# EAGLE board CPC_RAM512K_SN74_v2.10 (EAGLE 6.4)
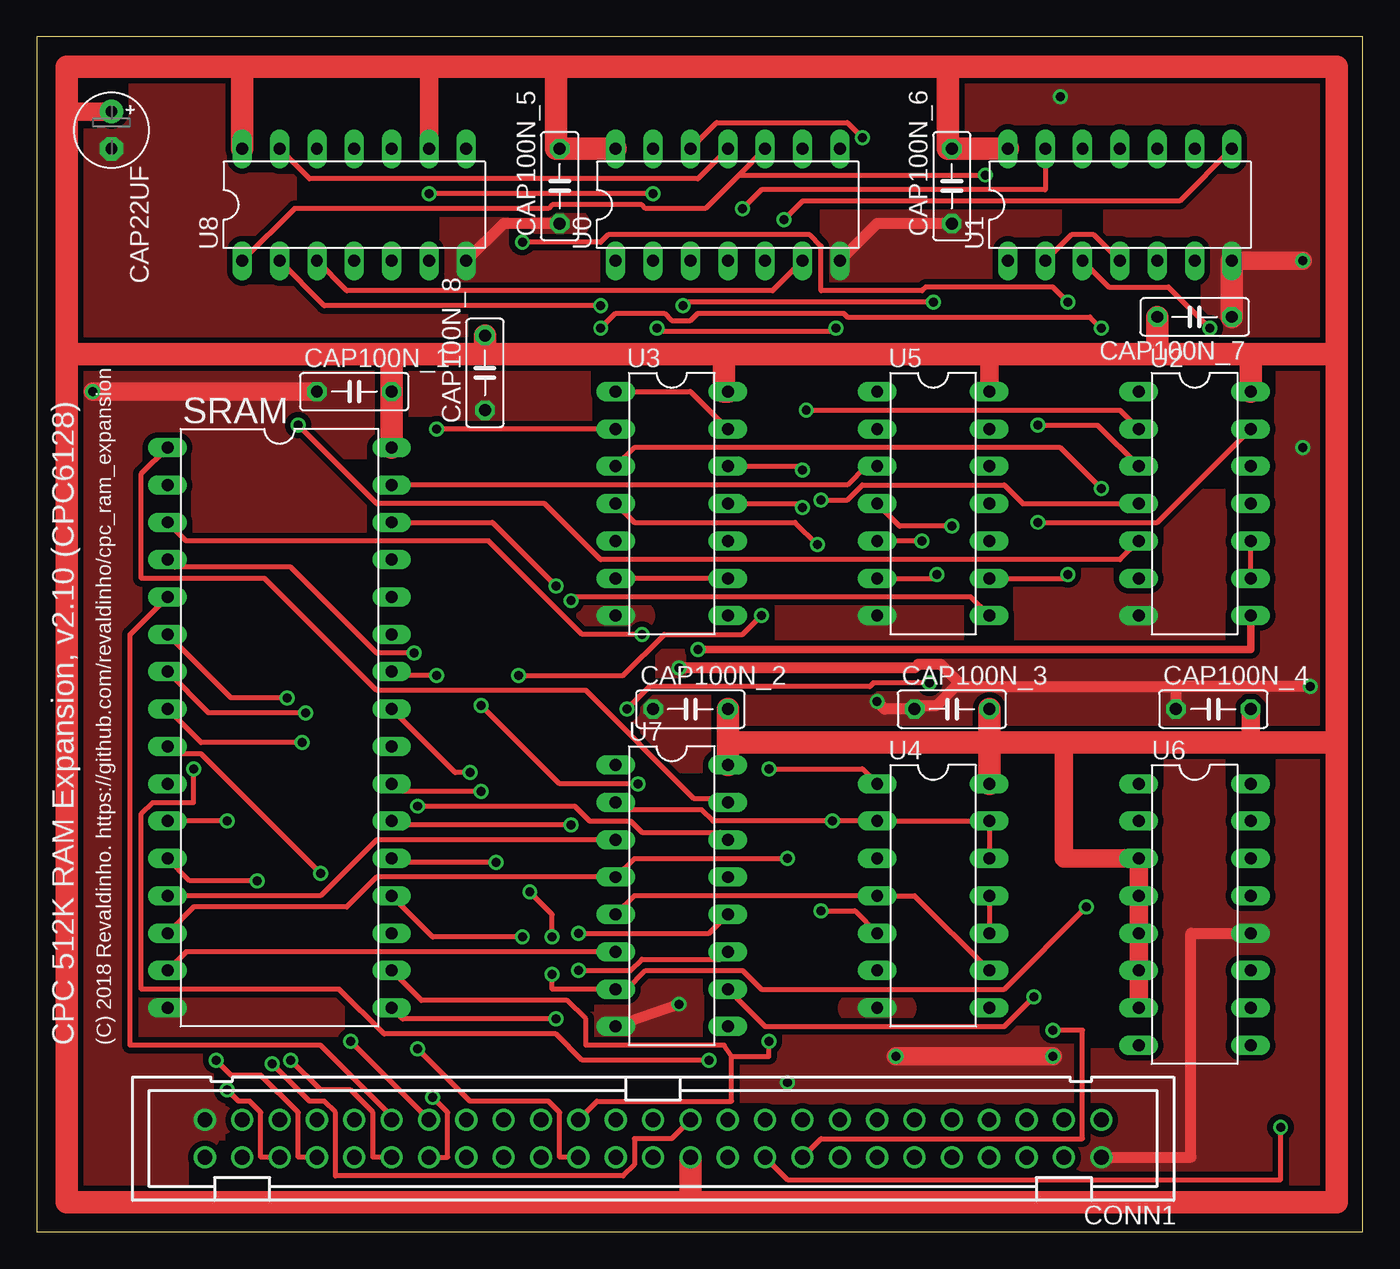
[diagram p0: board, top side]
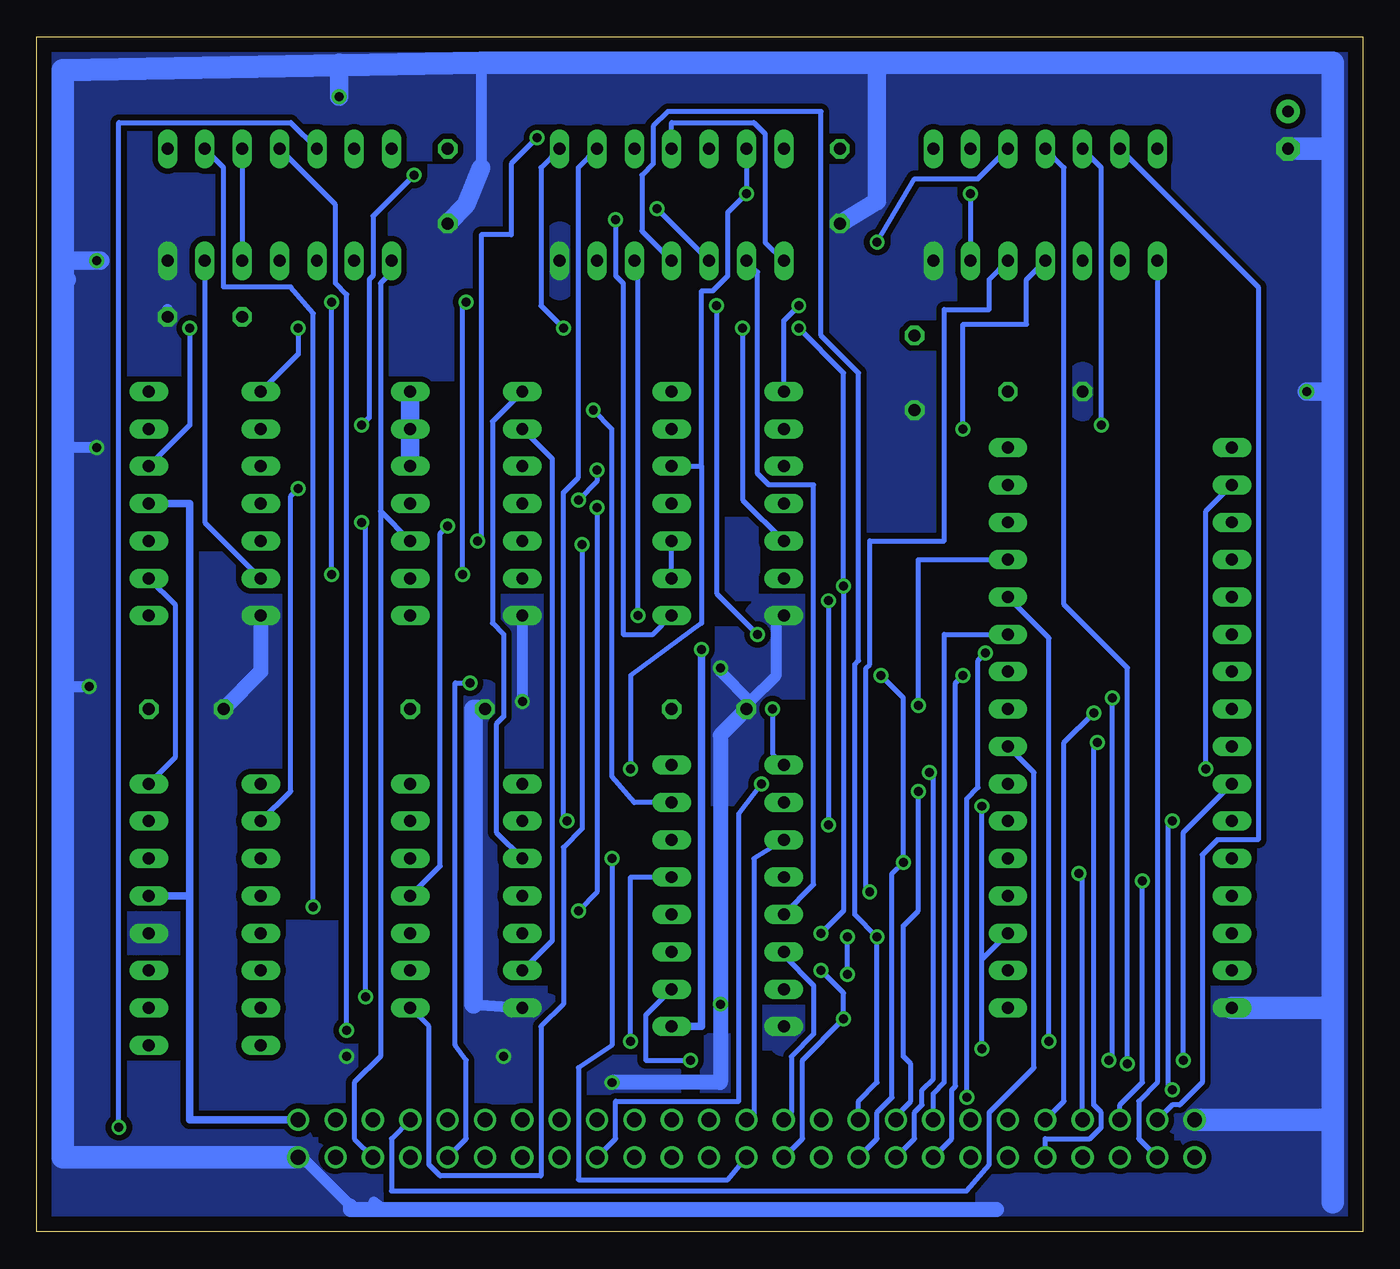
[diagram p1: board, bottom side, seen from below]

Size 90.17 x 81.28 mm. Coordinates in mm from the lower left corner, seen from the top.
Outline: 0,0 90.17,0 90.17,81.28 0,81.28 0,0
Copper layers (1*16): Top 0.035mm / dielectric 1.5mm / Bottom 0.035mm
Design rules "default": minimum track width 10mil, minimum drill 24mil, track to track 8mil, track to pad 8mil, pad to pad 8mil, via to via 8mil, smd to smd 8mil, copper to edge 40mil, drill to drill 8mil, minimum pad ring 10mil, minimum via ring 8mil, stop-mask expansion 4mil, vias tented up to drill 0mil, thermal gap 10mil
Net classes: 0 signal: width 0.356 mm, clearance 0.254 mm; 1 supply: width 0.762 mm, clearance 0.381 mm

## Footprints (pad centres in the part's own frame; a part is rotated, then mirrored left to right if it is on the bottom)
E2,5-5 = drill 0.813 pad 1.6: + -1.27,0 | drill 0.813 pad 1.6 octagon: - 1.27,0
C050-025X075 = drill 0.813 octagon: 1 -2.54,0; 2 2.54,0
PAK100/2500-50 = drill 1 pad 1.422: 1 -30.48,-1.27; 2 -30.48,1.27; 3 -27.94,-1.27; 4 -27.94,1.27; 5 -25.4,-1.27; 6 -25.4,1.27; 7 -22.86,-1.27; 8 -22.86,1.27; 9 -20.32,-1.27; 10 -20.32,1.27; 11 -17.78,-1.27; 12 -17.78,1.27; 13 -15.24,-1.27; 14 -15.24,1.27; 15 -12.7,-1.27; 16 -12.7,1.27; 17 -10.16,-1.27; 18 -10.16,1.27; 19 -7.62,-1.27; 20 -7.62,1.27; 21 -5.08,-1.27; 22 -5.08,1.27; 23 -2.54,-1.27; 24 -2.54,1.27; 25 0,-1.27; 26 0,1.27; 27 2.54,-1.27; 28 2.54,1.27; 29 5.08,-1.27; 30 5.08,1.27; 31 7.62,-1.27; 32 7.62,1.27; 33 10.16,-1.27; 34 10.16,1.27; 35 12.7,-1.27; 36 12.7,1.27; 37 15.24,-1.27; 38 15.24,1.27; 39 17.78,-1.27; 40 17.78,1.27; 41 20.32,-1.27; 42 20.32,1.27; 43 22.86,-1.27; 44 22.86,1.27; 45 25.4,-1.27; 46 25.4,1.27; 47 27.94,-1.27; 48 27.94,1.27; 49 30.48,-1.27; 50 30.48,1.27
DIL32 = drill 0.813 long: 1 -19.05,-7.62; 2 -16.51,-7.62; 3 -13.97,-7.62; 4 -11.43,-7.62; 5 -8.89,-7.62; 6 -6.35,-7.62; 7 -3.81,-7.62; 8 -1.27,-7.62; 9 1.27,-7.62; 10 3.81,-7.62; 11 6.35,-7.62; 12 8.89,-7.62; 13 11.43,-7.62; 14 13.97,-7.62; 15 16.51,-7.62; 16 19.05,-7.62; 17 19.05,7.62; 18 16.51,7.62; 19 13.97,7.62; 20 11.43,7.62; 21 8.89,7.62; 22 6.35,7.62; 23 3.81,7.62; 24 1.27,7.62; 25 -1.27,7.62; 26 -3.81,7.62; 27 -6.35,7.62; 28 -8.89,7.62; 29 -11.43,7.62; 30 -13.97,7.62; 31 -16.51,7.62; 32 -19.05,7.62
DIL14 = drill 0.813 long: 1 -7.62,-3.81; 2 -5.08,-3.81; 3 -2.54,-3.81; 4 0,-3.81; 5 2.54,-3.81; 6 5.08,-3.81; 7 7.62,-3.81; 8 7.62,3.81; 9 5.08,3.81; 10 2.54,3.81; 11 0,3.81; 12 -2.54,3.81; 13 -5.08,3.81; 14 -7.62,3.81
DIL16 = drill 0.813 long: 1 -8.89,-3.81; 2 -6.35,-3.81; 3 -3.81,-3.81; 4 -1.27,-3.81; 5 1.27,-3.81; 6 3.81,-3.81; 7 6.35,-3.81; 8 8.89,-3.81; 9 8.89,3.81; 10 6.35,3.81; 11 3.81,3.81; 12 1.27,3.81; 13 -1.27,3.81; 14 -3.81,3.81; 15 -6.35,3.81; 16 -8.89,3.81

## Placement (x,y rotation side)
CAP22UF  [E2,5-5]  5.08,74.93 270 top
CAP100N_1  [C050-025X075]  21.59,57.15 0 top
CAP100N_2  [C050-025X075]  44.45,35.56 0 top
CAP100N_3  [C050-025X075]  62.23,35.56 0 top
CAP100N_4  [C050-025X075]  80.01,35.56 0 top
CAP100N_5  [C050-025X075]  35.56,71.12 90 top
CAP100N_6  [C050-025X075]  62.23,71.12 90 top
CAP100N_7  [C050-025X075]  78.74,62.23 180 top
CAP100N_8  [C050-025X075]  30.48,58.42 90 top
CONN1  [PAK100/2500-50]  41.91,6.35 180 top
SRAM  [DIL32]  16.51,34.29 270 top
U0  [DIL14]  46.99,69.85 0 top
U1  [DIL14]  73.66,69.85 0 top
U2  [DIL14]  78.74,49.53 270 top
U3  [DIL14]  43.18,49.53 270 top
U4  [DIL14]  60.96,22.86 270 top
U5  [DIL14]  60.96,49.53 270 top
U6  [DIL16]  78.74,21.59 270 top
U7  [DIL16]  43.18,22.86 270 top
U8  [DIL14]  21.59,69.85 0 top

## Library data of the parts
CAP22UF CAP100N_1-CAP100N_8 = resistor
CONN1 = con-3m
SRAM U0 U1-U8 = ic-package

## Nets
A0: CONN1.33 SRAM.23
A1: CONN1.34 SRAM.25
A2: CONN1.35 SRAM.27
A3: CONN1.36 SRAM.26
A4: CONN1.37 SRAM.28
A5: CONN1.38 SRAM.4
A6: CONN1.39 SRAM.5
A7: CONN1.40 SRAM.6
A8: CONN1.41 SRAM.7
A9: CONN1.42 SRAM.8
A10: CONN1.43 SRAM.9
A11: CONN1.44 SRAM.10
A12: CONN1.45 SRAM.12
A13: CONN1.46 SRAM.11
A14: CONN1.47 U0.1 U0.11 U8.13
A15: CONN1.48 U0.10 U2.3 U8.1
BUSACK_B: CONN1.13
BUSRESET_B: CONN1.11
BUSRQ_B: CONN1.14
CLK: CONN1.1 U2.11 U6.13
CLKEN_LAT_QB: U2.9 U2.10 U6.16
CURSOR: CONN1.5
D0: CONN1.25 SRAM.13 U7.3
D1: CONN1.26 SRAM.14 U7.4
D2: CONN1.27 SRAM.15 U7.6
D3: CONN1.28 SRAM.17 U7.11
D4: CONN1.29 SRAM.18 U7.13
D5: CONN1.30 SRAM.19 U7.14
D6: CONN1.31 SRAM.20 U0.4
D7: CONN1.32 SRAM.21 U0.5
EXP_B: CONN1.3
HALT_B: CONN1.17
INT_B: CONN1.16
IOREQ_B: CONN1.20 U1.12
LPEN: CONN1.4
M1_B: CONN1.22
MREQ_B: CONN1.23 U8.11
N20: U3.3 U6.2
N21: U3.1 U3.13 U8.2
N22: U3.2 U8.4
N23: U0.6 U8.3
N24: U0.3 U1.13
N25: U3.11 U4.5
N26: U4.6 U5.2
N27: U4.3 U5.1
N28: U0.12 U5.5
N29: U4.10 U4.11 U5.4
N30: U0.8 U3.5
N31: U3.4 U4.8
N32: U3.6 U3.9 U3.10
N33: U1.8 U3.8
N34: U2.5 U8.12
N35: U0.13 U2.4 U3.12 U4.1 U8.6
N36: U1.6 U2.6
N37: U1.5 U1.10
N38: U1.3 U2.12
N39: U1.2 U1.4
N40: U5.9 U8.10
NMI_B: CONN1.15
RAMADRHI0: SRAM.3 U5.6
RAMADRHI1: SRAM.31 U5.3
RAMADRHI2: SRAM.2 U2.13 U7.10
RAMADRHI3: SRAM.30 U2.1 U7.12
RAMADRHI4: SRAM.1 U2.2 U7.15
RAMBLOCK_Q0: U0.9 U4.2 U4.12 U4.13 U7.2
RAMBLOCK_Q1: U0.2 U4.4 U4.9 U7.5
RAMBLOCK_Q2: U1.9 U7.7 U8.5
RAMCS_B: SRAM.22 U5.8
RAMDIS: CONN1.6 U1.1 U5.10
RAMRD_B: CONN1.7 SRAM.24
RD_B: CONN1.19
READY: CONN1.12
RESET_B: CONN1.10 U7.1
RFSH_B: CONN1.21
ROMDIS: CONN1.8
ROMEN_B: CONN1.9
SOUND: CONN1.50
VDD [supply]: CAP22UF.+ CAP100N_1.2 CAP100N_2.2 CAP100N_3.2 CAP100N_4.2 CAP100N_5.2 CAP100N_6.2 CAP100N_7.2 CAP100N_8.2 CONN1.24 SRAM.32 U0.14 U1.14 U2.14 U3.14 U4.14 U5.12 U5.13 U5.14 U6.3 U6.4 U6.5 U6.6 U6.7 U7.16 U8.9 U8.14
VSS [supply]: CAP22UF.- CAP100N_1.1 CAP100N_2.1 CAP100N_3.1 CAP100N_4.1 CAP100N_5.1 CAP100N_6.1 CAP100N_7.1 CAP100N_8.1 CONN1.2 CONN1.49 SRAM.16 U0.7 U1.7 U2.7 U3.7 U4.7 U5.7 U6.12 U7.8 U8.7
WCLK_B: U2.8 U7.9
WR_B: CONN1.18 SRAM.29 U1.11

## Tracks (layer width: path | path; a pad name or v marks a point on that pad's centre or on a via)
A0  (via drill 0.61)
  Top 0.356: SRAM.23 24.64,29.97 v30.23,29.97
  Bottom 0.356: v30.23,29.97 30.23,21.84 31.24,20.83 31.24,11.94 30.73,11.43 30.73,8.89 31.75,7.87 CONN1.33
A1  (via drill 0.61)
  Top 0.356: SRAM.25 28.45,31.24 v29.46,31.24
  Bottom 0.356: v29.46,31.24 29.21,30.99 29.21,10.41 29.97,9.65 29.97,8.64 30.48,8.13 30.48,6.35 CONN1.34
A2
  Bottom 0.356: SRAM.27 28.45,40.64 28.45,10.16 29.21,9.4 CONN1.35
A3  (via drill 0.61)
  Top 0.356: SRAM.26 24.38,37.85 v27.18,37.85
  Bottom 0.356: v27.18,37.85 27.69,37.34 27.69,9.91 27.94,9.65 27.94,6.35 CONN1.36
A4  (via drill 0.61)
  Top 0.356: CONN1.37 v21.34,12.95
  Bottom 0.356: SRAM.28 21.34,40.39 v21.34,12.95
A5  (via drill 0.61)
  Top 0.356: SRAM.4 9.4,45.21 17.27,45.21 23.11,39.37 v25.65,39.37 | v26.92,9.14 27.94,8.13 27.94,5.08 CONN1.38
  Bottom 0.356: v25.65,39.37 26.16,38.86 26.16,30.23 26.92,29.46 v26.92,9.14
A6
  Top 0.356: SRAM.5 6.35,40.64 6.35,12.7 19.3,12.7 24.13,7.87 CONN1.39
A7  (via drill 0.61)
  Top 0.356: SRAM.6 13.21,36.32 v17.02,36.32 | v17.27,11.68 19.3,9.65 21.34,9.65 22.86,8.13 22.86,5.08 CONN1.40
  Bottom 0.356: v17.02,36.32 17.02,11.94 v17.27,11.68
A8  (via drill 0.61)
  Top 0.356: SRAM.7 11.68,35.31 v18.29,35.31
  Bottom 0.356: v18.29,35.31 20.32,33.27 20.32,8.89 CONN1.41
A9  (via drill 0.61)
  Top 0.356: SRAM.8 11.18,33.27 v18.03,33.27
  Bottom 0.356: v18.03,33.27 18.29,33.02 18.29,8.64 17.78,8.13 17.78,7.11 18.54,6.35 21.59,6.35 CONN1.42
A10  (via drill 0.61)
  Top 0.356: SRAM.9 9.4,32.51 11.18,32.51 v19.3,24.38
  Bottom 0.356: v19.3,24.38 19.05,24.13 CONN1.43
A11  (via drill 0.61)
  Top 0.356: v12.19,11.68 13.21,10.67 15.24,10.67 17.78,8.13 17.78,5.08 CONN1.44
  Bottom 0.356: SRAM.10 12.19,27.18 v12.19,11.68
A12  (via drill 0.61)
  Top 0.356: SRAM.12 10.41,23.88 v14.99,23.88
  Bottom 0.356: v14.99,23.88 14.99,10.16 16.51,8.64 CONN1.45
A13  (via drill 0.61)
  Top 0.356: v12.95,27.94 SRAM.11 | v12.95,9.65 13.72,8.89 14.48,8.89 15.24,8.13 15.24,5.08 CONN1.46
  Bottom 0.356: v12.95,27.94 13.21,27.69 13.21,9.91 v12.95,9.65
A14
  Top 0.356: U8.13 18.54,71.63 44.96,71.63 U0.11
  Bottom 0.356: U0.1 40.64,67.31 40.64,74.68 41.4,75.44 46.99,75.44 U0.11 | CONN1.47 12.95,8.64 12.45,8.64 10.92,10.16 10.92,25.65 9.91,26.67 7.11,26.67 7.11,64.26 U8.13
A15  (via drill 0.61)
  Top 0.356: U8.1 17.53,69.6 34.8,69.6 35.05,69.85 41.15,69.85 41.4,69.6 45.47,69.6 47.75,71.88 | U0.10 47.75,71.88 | U2.3 72.14,54.86 v68.07,54.86 | 47.75,71.88 v64.52,71.88
  Bottom 0.356: v68.07,54.86 67.56,55.37 67.56,64.77 67.31,65.02 67.31,69.09 v64.52,71.88 | CONN1.48 15.24,6.35 15.24,8.89 13.97,10.16 U8.1
CLK
  Bottom 0.508: 79.76,22.86 U6.13 | 79.76,22.86 79.76,7.62 CONN1.1 | U2.11 79.76,49.53 79.76,22.86
CLKEN_LAT_QB
  Top 0.356: U2.9 U2.10
  Bottom 0.356: U6.16 80.77,32.26 80.77,42.67 U2.9
D0
  Top 0.356: SRAM.13 19.3,22.86 23.11,26.67 U7.3
  Bottom 0.356: CONN1.25 41.4,7.87 41.4,25.4 U7.3
D1  (via drill 0.61)
  Top 0.356: SRAM.14 10.67,22.1 21.08,22.1 23.11,24.13 U7.4 40.64,25.4 v51.05,25.4
  Bottom 0.356: CONN1.26 43.18,3.56 53.34,3.56 53.34,11.18 51.05,12.7 v51.05,25.4
D2
  Top 0.356: SRAM.15 10.16,19.05 U7.6
  Bottom 0.356: CONN1.27 38.86,8.13 38.86,11.94 37.34,13.46 37.34,16.76 39.37,18.8 U7.6
D3  (via drill 0.61)
  Top 0.356: SRAM.17 24.89,14.48 v35.31,14.48 | U7.11 46.48,18.54 41.15,18.54 40.39,17.78 v36.83,17.78
  Bottom 0.356: CONN1.28 38.1,6.35 38.1,11.68 v35.31,14.48 35.31,16.26 v36.83,17.78
D4  (via drill 0.61)
  Top 0.356: SRAM.18 26.16,15.75 36.07,15.75 37.34,14.48 37.34,12.7 46.74,12.7 47.24,11.94 | 47.24,11.94 47.24,8.89 38.1,8.89 CONN1.29 | v49.78,12.95 49.78,11.94 47.24,11.94
  Bottom 0.356: U7.13 49.78,24.13 v49.78,12.95
D5  (via drill 0.61)
  Top 0.356: v25.91,12.45 29.46,8.89 34.8,8.89 35.56,8.13 35.56,5.08 CONN1.30 | U7.14 46.48,27.18 41.15,27.18 40.39,27.94 37.59,27.94 36.58,28.96 v25.91,28.96
  Bottom 0.356: 25.91,18.54 SRAM.19 | v25.91,12.45 25.91,18.54 | 25.91,18.54 v25.91,28.96
D6  (via drill 0.61)
  Top 0.356: SRAM.20 26.92,20.07 v33.02,20.07
  Bottom 0.356: CONN1.31 34.29,8.89 33.02,10.16 v33.02,20.07 34.54,21.59 34.54,38.61 34.29,38.86 34.29,58.42 36.83,60.96 36.83,76.2 47.24,76.2 48.26,75.18 48.26,72.64 49.02,71.88 49.02,68.07 U0.4
D7  (via drill 0.61)
  Top 0.356: SRAM.21 24.38,25.15 v31.24,25.15 | v49.28,41.91 48.01,40.64 42.67,40.64 39.88,37.85 v32.77,37.85
  Bottom 0.356: CONN1.32 33.02,6.35 33.02,8.13 32,9.14 32,24.38 v31.24,25.15 31.24,36.32 v32.77,37.85 | U0.5 49.28,65.79 v49.28,41.91
IOREQ_B  (via drill 0.61)
  Top 0.356: v84.58,7.11 84.58,3.56 51.05,3.56 CONN1.20
  Bottom 0.356: U1.12 72.9,75.44 84.58,75.44 v84.58,7.11
MREQ_B  (via drill 0.61)
  Top 0.356: v16,11.43 18.54,8.89 19.56,8.89 20.32,8.13 20.32,3.81 39.88,3.81 40.64,4.57 40.64,6.35 43.18,6.35 CONN1.23
  Bottom 0.356: U8.11 20.32,72.39 20.32,42.67 16,38.35 v16,11.43
N20  (via drill 0.61)
  Top 0.356: U3.3 40.64,53.34 69.6,53.34 v72.39,50.55
  Bottom 0.356: v72.39,50.55 72.9,50.04 72.9,29.97 U6.2
N21  (via drill 0.61)
  Top 0.356: U8.2 19.56,62.99 v38.35,62.99 | U3.13 44.45,57.15 U3.1
  Bottom 0.356: v38.35,62.99 39.37,61.98 U3.1
N22  (via drill 0.61)
  Top 0.356: U3.2 v27.18,54.61
  Bottom 0.356: v27.18,54.61 27.18,61.72 22.86,61.72 22.86,64.77 U8.4
N23
  Top 0.356: U8.3 21.08,64.01 50.04,64.01 U0.6
N24  (via drill 0.61)
  Top 0.356: v48.01,69.6 49.28,70.87 68.58,70.87 U1.13
  Bottom 0.356: v48.01,69.6 U0.3
N25  (via drill 0.61)
  Top 0.356: U4.5 55.63,21.84 v53.34,21.84 | v52.07,49.28 51.82,49.53 U3.11
  Bottom 0.356: v53.34,21.84 52.07,23.11 v52.07,49.28
N26
  Bottom 0.356: U4.6 55.12,19.81 55.12,52.58 U5.2
N27
  Bottom 0.356: U4.3 58.93,27.18 58.93,34.54 58.42,35.05 58.42,40.64 59.18,41.4 59.18,55.12 U5.1
N28  (via drill 0.61)
  Top 0.356: v60.2,46.99 U5.5 | v56.13,74.42 55.12,75.44 46.23,75.44 U0.12
  Bottom 0.356: v60.2,46.99 59.94,47.24 59.94,67.82 57.91,67.82 57.91,72.64 v56.13,74.42
N29  (via drill 0.61)
  Top 0.356: U4.11 U4.10 | U5.4 58.67,48.01 v62.23,48.01
  Bottom 0.356: v62.23,48.01 62.74,47.5 62.74,24.89 U4.11
N30  (via drill 0.61)
  Top 0.356: v42.16,61.47 42.42,61.21 54.1,61.21 v54.36,61.47
  Bottom 0.356: U3.5 42.16,49.78 v42.16,61.47 | v54.36,61.47 55.88,62.99 55.88,72.39 U0.8
N31  (via drill 0.61)
  Top 0.356: v53.09,46.74 51.56,48.26 40.64,48.26 U3.4
  Bottom 0.356: U4.8 63.5,13.97 63.5,4.57 62.74,3.81 55.88,3.81 55.88,13.97 54.36,15.49 54.36,26.16 53.09,27.43 v53.09,46.74
N32
  Top 0.356: U3.9 U3.6
  Bottom 0.356: U3.9 U3.10
N33  (via drill 0.61)
  Top 0.356: v50.8,68.83 52.07,70.1 77.72,70.1 U1.8
  Bottom 0.356: U3.8 48.26,40.64 50.29,40.64 50.29,64.52 50.8,65.02 v50.8,68.83
N34  (via drill 0.61)
  Top 0.356: v17.78,54.86 23.11,49.53 34.54,49.53 38.35,45.72 73.66,45.72 U2.5
  Bottom 0.356: U8.12 17.78,72.39 v17.78,54.86
N35  (via drill 0.61)
  Top 0.356: v41.91,70.61 v26.67,70.61 | U4.1 56.13,31.5 v49.78,31.5 | U2.4 67.06,49.53 65.79,50.8 56.13,50.8 55.12,49.78 v53.34,49.78 | v52.07,51.82 51.82,52.07 U3.12
  Bottom 0.356: v26.67,70.61 U8.6 | U0.13 v41.91,70.61 43.18,69.34 43.18,65.02 44.2,64.01 44.96,64.01 44.96,52.07 | v49.78,31.5 49.78,37.85 44.96,41.4 44.96,52.07 | v53.34,49.78 52.07,51.05 v52.07,51.82 | U3.12 44.96,52.07
N36
  Bottom 0.356: U2.6 78.74,48.26 U1.6
N37
  Bottom 0.356: U1.10 U1.5
N38  (via drill 0.61)
  Top 0.356: v79.76,61.47 76.96,64.26 72.9,64.26 U1.3
  Bottom 0.356: U2.12 79.76,54.86 v79.76,61.47
N39
  Top 0.356: U1.2 70.36,67.82 71.88,67.82 U1.4
N40  (via drill 0.61)
  Top 0.356: v33.02,67.31 38.35,67.31 38.86,67.82 52.58,67.82 53.34,67.06 53.34,64.01 60.2,64.01 60.45,64.26 69.09,64.26 v70.1,63.25 | v70.1,44.7 69.85,44.45 U5.9
  Bottom 0.356: U8.10 26.16,71.63 30.48,71.63 v33.02,67.31 | v70.1,44.7 v70.1,63.25
RAMADRHI0  (via drill 0.61)
  Top 0.356: SRAM.3 10.16,46.99 30.73,46.99 37.08,40.64 v41.15,40.64 | v43.94,62.99 44.2,63.25 v60.96,63.25 | v61.21,44.7 60.96,44.45 U5.6
  Bottom 0.356: v41.15,40.64 43.94,43.43 v43.94,62.99 | v60.96,63.25 61.21,62.99 v61.21,44.7
RAMADRHI1
  Top 0.356: SRAM.31 55.12,50.8 56.39,52.07 U5.3
RAMADRHI2  (via drill 0.61)
  Top 0.356: v10.67,31.5 10.67,29.21 7.87,29.21 7.11,28.45 7.11,16.51 20.57,16.51 23.62,13.46 35.31,13.46 37.08,11.68 v45.72,11.68 | U2.13 76.2,48.26 v68.07,48.26 | v67.82,16 65.79,13.97 49.53,13.97 U7.10
  Bottom 0.356: SRAM.2 10.67,49.02 v10.67,31.5 | v45.72,11.68 48.77,11.68 48.77,14.73 U7.10 | v68.07,48.26 67.82,48.01 v67.82,16
RAMADRHI3  (via drill 0.61)
  Top 0.356: U7.12 45.72,20.32 v36.83,20.32 | v35.31,43.94 30.99,48.26 SRAM.30 | v72.39,61.47 71.63,62.23 55.12,62.23 54.86,62.48 44.96,62.48 44.45,61.98 43.18,61.98 42.67,62.48 39.37,62.48 v38.35,61.47
  Bottom 0.356: v36.83,20.32 35.31,21.84 v35.31,43.94 35.31,58.42 v38.35,61.47 | U2.1 72.39,59.69 v72.39,61.47
RAMADRHI4  (via drill 0.61)
  Top 0.356: SRAM.1 7.11,51.56 7.11,44.45 15.49,44.45 23.11,36.83 37.34,36.83 44.7,29.46 46.74,29.46 U7.15 | U2.2 73.66,55.88 v52.32,55.88
  Bottom 0.356: v52.32,55.88 51.05,54.61 51.05,30.99 49.53,29.21 U7.15
RAMBLOCK_Q0  (via drill 0.61)
  Top 0.356: U4.12 U4.13 U4.2 v54.1,27.94 45.97,27.94 45.21,28.7 39.88,28.7 U7.2
  Bottom 0.356: U0.9 53.34,72.39 53.34,51.31 54.36,50.29 54.36,28.19 v54.1,27.94
RAMBLOCK_Q1
  Top 0.356: U7.5 40.64,22.86 U4.4 59.69,22.86 U4.9
  Bottom 0.356: U0.2 41.15,65.28 41.15,51.56 40.39,50.8 37.34,50.8 37.34,23.62 U7.5
RAMBLOCK_Q2  (via drill 0.61)
  Top 0.356: v33.53,23.11 35.05,21.59 v35.05,20.07 | v35.05,17.53 35.05,16.51 U7.7 40.13,16.51 41.4,17.78 48.01,17.78 49.28,16.51 65.79,16.51 v71.37,22.1
  Bottom 0.356: U8.5 25.4,64.77 25.4,62.74 28.45,62.74 28.45,46.99 33.53,46.99 33.53,38.61 33.78,38.35 33.78,23.37 v33.53,23.11 | v35.05,17.53 v35.05,20.07 | U1.9 77.47,72.39 77.47,64.26 72.9,64.26 71.37,62.48 v71.37,22.1
RAMCS_B  (via drill 0.61)
  Top 0.356: SRAM.22 24.38,27.69 v36.32,27.69 | v36.32,42.93 36.58,43.18 63.5,43.18 U5.8
  Bottom 0.356: v36.32,42.93 v36.32,27.69
RAMDIS
  Bottom 0.356: 66.8,49.02 U5.10 | 66.8,49.02 66.8,64.52 66.04,65.28 U1.1 | CONN1.6 68.58,6.35 68.58,10.16 66.8,11.94 66.8,49.02
RAMRD_B
  Bottom 0.356: SRAM.24 22.35,31.24 22.35,11.18 25.4,8.13 25.4,4.57 26.92,2.79 66.04,2.79 66.04,6.35 CONN1.7
RESET_B  (via drill 0.61)
  Top 0.356: v40.13,35.56 41.66,37.08 56.64,37.08 56.9,37.34 v60.71,37.34
  Bottom 0.356: U7.1 40.13,32.51 v40.13,35.56 | v60.71,37.34 61.72,37.34 61.72,12.7 60.96,11.68 60.96,6.35 CONN1.10
VDD
  Top 0.762: 61.98,74.17 CAP100N_6.2 | 61.98,78.74 61.98,79.25 | 69.85,25.4 70.1,25.4
  Top 1.27: U6.7 U6.6 U6.5 U6.4 U6.3 70.1,25.4 | 64.77,59.69 U5.14 | 26.67,79.25 U8.9 | 82.55,33.27 CAP100N_4.2 | 69.85,33.27 69.85,25.4 | 2.03,76.2 CAP22UF.+
  Top 1.524: 44.45,2.03 2.03,2.03 2.03,76.2 2.03,79.25 13.97,79.25 | 44.45,2.03 88.39,2.03 88.39,33.27 | 88.39,33.27 88.39,59.69 | 88.39,59.69 88.39,79.25 61.98,79.25 35.31,79.25 | 35.31,79.25 26.67,79.25 13.97,79.25 | CONN1.24 44.45,2.03 | 88.39,59.69 82.55,59.69 | 82.55,59.69 76.2,59.69 | 76.2,59.69 64.77,59.69 46.74,59.69 | 46.74,59.69 30.48,59.69 | 30.48,59.69 24.13,59.69 | 24.13,59.69 CAP100N_1.2 SRAM.32 | CAP100N_7.2 76.2,59.69 | U2.14 82.55,59.69 | U3.14 46.74,57.15 46.74,59.69 | 35.31,79.25 35.31,73.66 CAP100N_5.2 U0.14 | U1.14 CAP100N_6.2 | 24.13,59.69 2.29,59.69 2.29,59.94 | U7.16 46.99,33.27 | 46.99,33.27 CAP100N_2.2 | U4.14 64.77,33.27 | 64.77,33.27 CAP100N_3.2 | 46.99,33.27 64.77,33.27 | 64.77,33.27 69.85,33.27 82.55,33.27 88.39,33.27 | 61.98,73.66 61.98,74.17 61.98,78.74 61.98,78.99 | U8.14 13.97,79.25 | CAP100N_8.2 30.48,59.69
  Bottom 1.27: U5.12 U5.13 U5.14
VSS  (via drill 0.61)
  Top 0.762: v43.69,15.49 U7.8 | v57.15,36.07 57.66,35.56 CAP100N_3.1 59.94,35.81 61.21,35.81 62.48,37.08 62.74,37.08 | 62.74,37.08 77.47,37.08 | v43.69,38.35 59.69,38.35 59.94,38.61 61.47,38.61 62.74,37.34 62.74,37.08 | U0.7 57.15,68.58 CAP100N_6.1 | U8.7 31.75,68.58 CAP100N_5.1 | U6.12 78.49,20.32 78.49,5.08 CONN1.2 | 77.47,37.08 CAP100N_4.1 | v86.61,37.08 77.47,37.08
  Top 1.27: v3.81,57.15 CAP100N_1.1 | v58.42,11.94 v69.09,11.94 | U1.7 v86.11,66.04
  Top 1.524: CAP100N_7.1 U1.7
  Bottom 0.762: U3.7 39.88,41.4 39.88,37.85 41.66,36.07 | 41.66,36.07 41.66,35.81 CAP100N_2.1 | 60.45,15.49 U4.7 | v57.15,36.07 U5.7 | 41.66,36.07 43.69,38.1 v43.69,38.35 | 59.94,79.5 59.94,72.39 | 88.39,37.08 v86.61,37.08 | 66.55,1.52 67.25,2.03 | v86.11,53.34 88.14,53.34 88.14,64.77 | 68.83,1.78 71.88,4.83 CONN1.2 | 81.28,62.74 CAP100N_7.1
  Bottom 1.016: CAP100N_2.1 43.69,33.78 v43.69,15.49 43.69,10.16 v51.05,10.16 | CAP100N_4.1 74.93,38.1 U2.7 | 24.89,1.52 66.55,1.52 68.83,1.52 68.83,1.78
  Bottom 1.27: 60.45,15.49 60.45,35.56 CAP100N_3.1 | 2.03,57.15 v3.81,57.15 | 88.39,64.77 88.14,64.77 | CAP100N_5.1 33.02,70.1 33.02,79.5 | CAP100N_6.1 60.96,69.85 59.94,72.39 | 88.39,66.04 v86.11,66.04 85.85,66.04 | 69.6,79.5 v69.6,77.22
  Bottom 1.524: CONN1.2 88.39,5.08 88.39,37.08 88.39,64.77 88.39,66.04 88.39,78.99 59.94,79.5 33.02,79.5 2.03,79.5 2.03,73.66 | 2.03,73.66 2.03,57.15 2.03,15.24 | 2.03,15.24 2.03,7.62 | 2.03,7.62 2.03,2.03 | CAP22UF.- 2.03,73.66 | CONN1.49 2.03,7.62 | SRAM.16 2.03,15.24
  pour Top: 0,0 0,81.28 90.17,81.28 90.17,0
  pour Bottom: 0,0 0,81.28 90.17,81.28 90.17,0
WCLK_B  (via drill 0.61)
  Top 0.508: v44.96,39.62 82.55,39.62 U2.8
  Bottom 0.508: U7.9 44.96,13.97 v44.96,39.62
WR_B  (via drill 0.61)
  Top 0.356: v30.23,35.81 35.56,30.48 v40.89,30.48 | v69.09,13.72 71.12,13.72 71.12,6.35 53.34,6.35 CONN1.18
  Bottom 0.356: SRAM.29 30.23,45.72 v30.23,35.81 | v40.89,30.48 42.42,28.45 42.42,8.89 50.8,8.89 50.8,6.35 CONN1.18 | U1.11 69.85,69.85 69.85,64.52 69.09,63.75 v69.09,13.72

## Text on the board
tPlace: CPC 512K RAM Expansion, v2.10 (CPC6128) | (C) 2018 Revaldinho. https://github.com/revaldinho/cpc_ram_expansion